# EAGLE board top_3-28-21 (EAGLE 9.6.1)
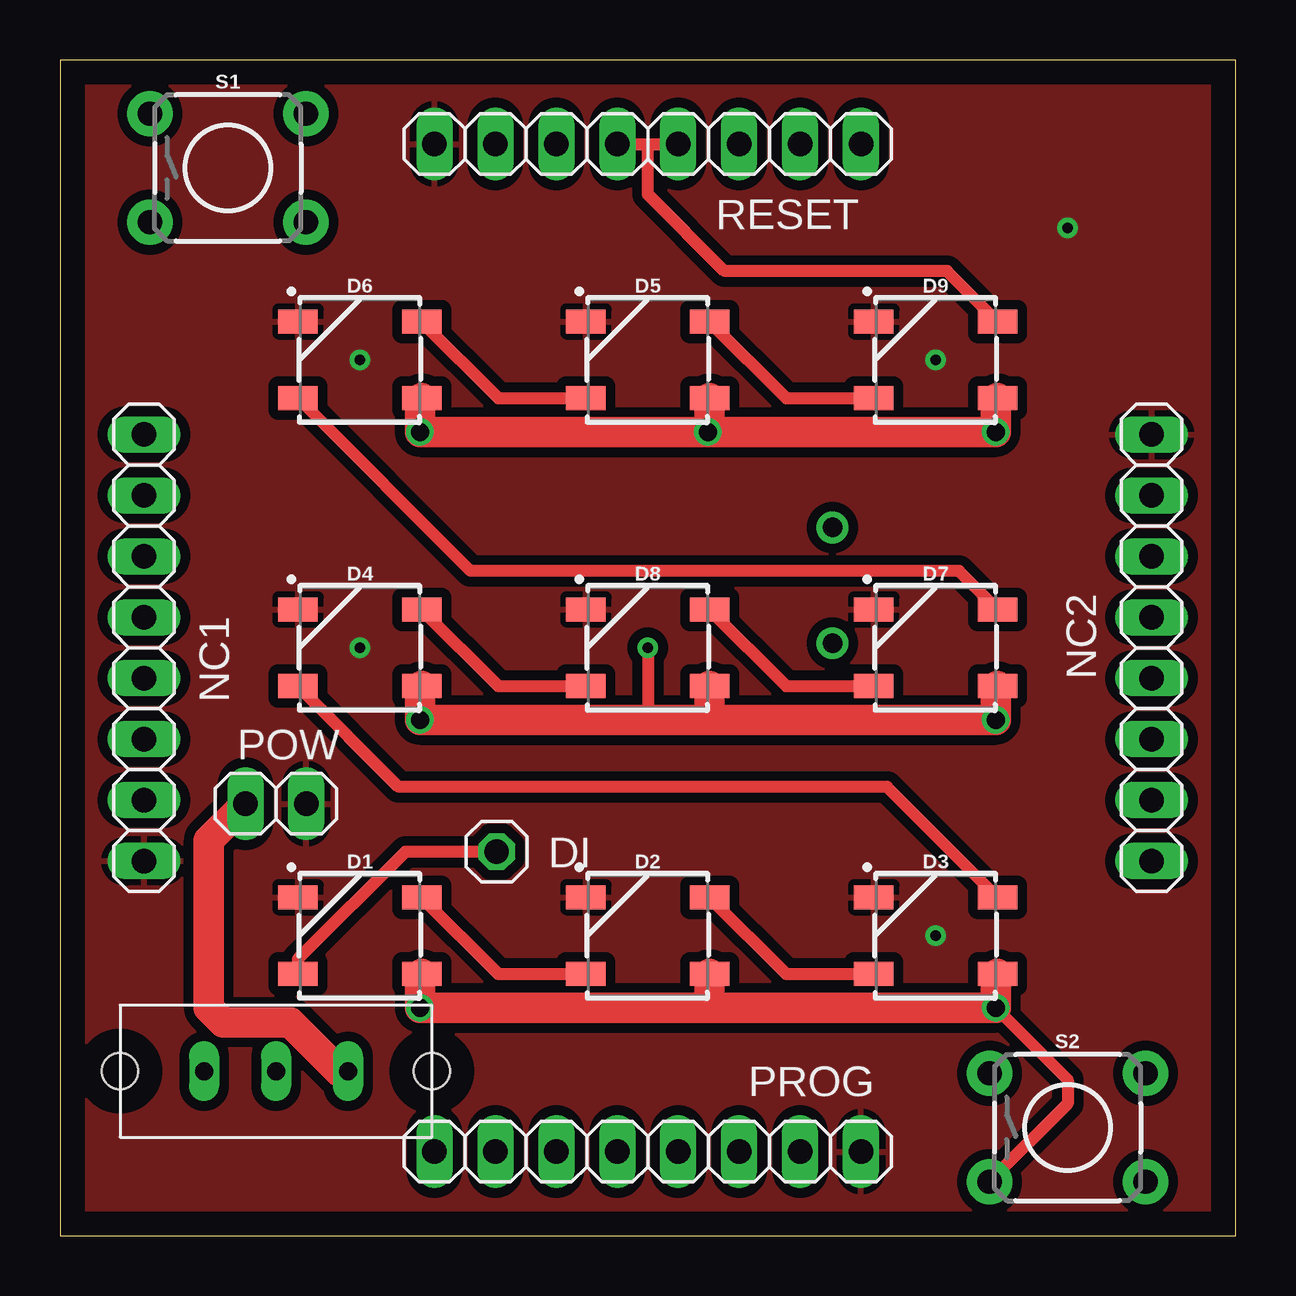
[diagram p0: board, top side]
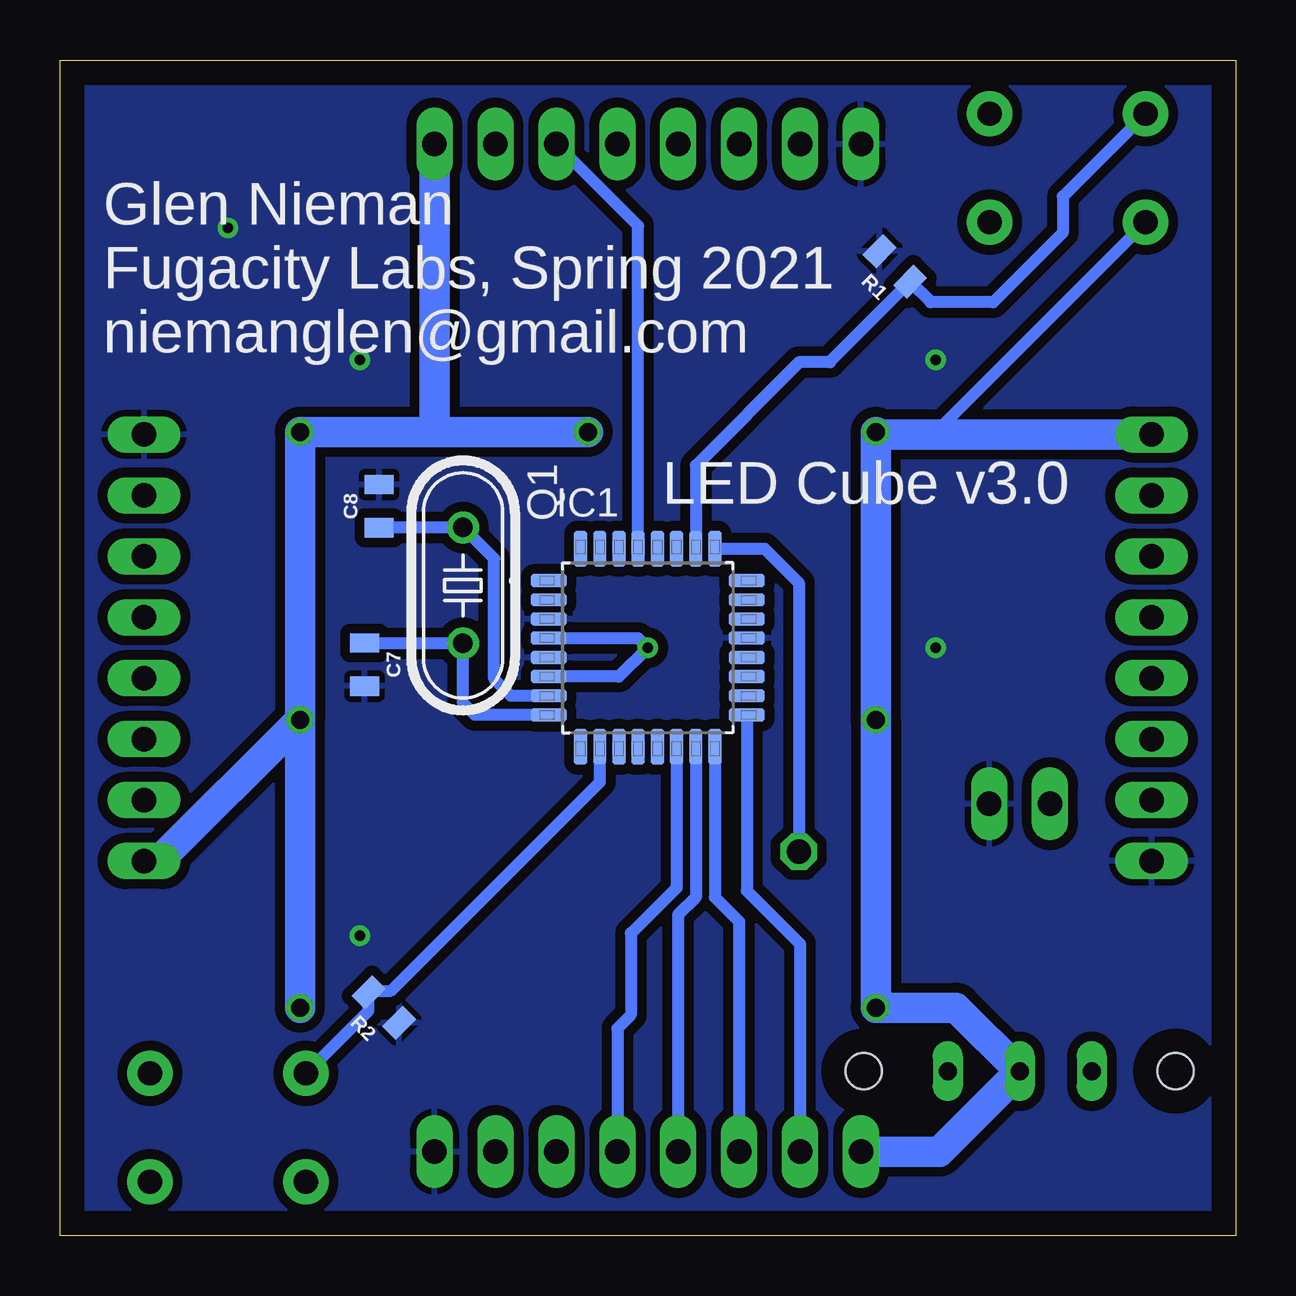
[diagram p1: board, bottom side, seen from below]

Size 49 x 49 mm. Coordinates in mm from the lower left corner, seen from the top.
Outline: 0,0 49,0 49,49 0,49 0,0
Copper layers (1*16): Top 0.035mm / dielectric 1.5mm / Bottom 0.035mm
Design rules "default *": minimum track width 6mil, minimum drill 0.35mm, track to track 6mil, track to pad 6mil, pad to pad 6mil, via to via 6mil, smd to smd 6mil, copper to edge 40mil, drill to drill 6mil, minimum pad ring 10mil, minimum via ring 8mil, stop-mask expansion 4mil, vias tented up to drill 100mil, thermal gap 10mil
Net classes: 1 pow_width: width 0.102 mm

## Footprints (pad centres in the part's own frame; a part is rotated, then mirrored left to right if it is on the bottom)
0805 = smd 0.8 x 1.2: 1 -0.9,0; 2 0.9,0
WS2812B = smd 1.651 x 1: 1 2.577,-1.6; 2 2.577,1.6; 3 -2.577,1.6; 4 -2.577,-1.6
1X01 = drill 1.016 octagon: 1 0,0
TQFP-32 = smd 1.5 x 0.57: 1 -4.13,2.8; 2 -4.13,2; 3 -4.13,1.2; 4 -4.13,0.4; 5 -4.13,-0.4; 6 -4.13,-1.2; 7 -4.13,-2; 8 -4.13,-2.8; 17 4.13,-2.8; 18 4.13,-2; 19 4.13,-1.2; 20 4.13,-0.4; 21 4.13,0.4; 22 4.13,1.2; 23 4.13,2; 24 4.13,2.8 | smd 0.57 x 1.5: 9 -2.8,-4.13; 10 -2,-4.13; 11 -1.2,-4.13; 12 -0.4,-4.13; 13 0.4,-4.13; 14 1.2,-4.13; 15 2,-4.13; 16 2.8,-4.13; 25 2.8,4.13; 26 2,4.13; 27 1.2,4.13; 28 0.4,4.13; 29 -0.4,4.13; 30 -1.2,4.13; 31 -2,4.13; 32 -2.8,4.13
1X08 = drill 1.016 long: 1 -8.89,0; 2 -6.35,0; 3 -3.81,0; 4 -1.27,0; 5 1.27,0; 6 3.81,0; 7 6.35,0; 8 8.89,0
1X02 = drill 1.016 long: 1 -1.27,0; 2 1.27,0
HC49/S = drill 0.813: 1 -2.413,0; 2 2.413,0
TACTILE_SWITCH_PTH_6.0MM = drill 1.016 pad 1.88: 1 -3.251,2.261; 2 3.251,2.261; 3 -3.251,-2.261; 4 3.251,-2.261
SLIDE_SWITCH_1P2T = drill 0.75 long: 1 3.5,2.75; 2 6.5,2.75; 3 9.5,2.75 | hole 1.5: 0,2.75; 13,2.75

## Placement (x,y rotation side)
C7  22pF  [0805]  36.3,23.8 270 bottom
C8  22pF  [0805]  35.7,30.4 90 bottom
D1  WS2812B  [WS2812B]  12.5,12.5 0 top
D2  WS2812B  [WS2812B]  24.5,12.5 0 top
D3  WS2812B  [WS2812B]  36.5,12.5 0 top
D4  WS2812B  [WS2812B]  12.5,24.5 0 top
D5  WS2812B  [WS2812B]  24.5,36.5 0 top
D6  WS2812B  [WS2812B]  12.5,36.5 0 top
D7  WS2812B  [WS2812B]  36.5,24.5 0 top
D8  WS2812B  [WS2812B]  24.5,24.5 0 top
D9  WS2812B  [WS2812B]  36.5,36.5 0 top
DI  [1X01]  18.2,16 0 top
IC1  ATMEGA328P-AU  [TQFP-32]  24.5,24.5 0 bottom
NC1  [1X08]  3.5,24.5 90 top
NC2  [1X08]  45.5,24.5 270 top
POW  [1X02]  9,18 0 top
PROG  [1X08]  24.5,3.5 180 top
Q1  [HC49/S]  32.2,27.1 270 bottom
R1  10k  [0805]  14.2,40.4 135 bottom
R2  10k  [0805]  35.5,9.5 135 bottom
RESET  [1X08]  24.5,45.5 0 top
S1  [TACTILE_SWITCH_PTH_6.0MM]  7,44.5 0 top
S2  [TACTILE_SWITCH_PTH_6.0MM]  42,4.5 0 top
U$2  SLIDE_SWITCH_1P2T  [SLIDE_SWITCH_1P2T]  15.5,9.6 180 top

## Library data of the parts
C7 C8 = SparkFun-Capacitors; PROD_ID: CAP-11625
D1-D9 = my-LED-cube; PROD_ID: DIO-12503
DI NC1 NC2 POW PROG RESET = pinhead
IC1 = Microcontroller; CREATED_BY: PCBLayout.com; DIGIKEY_PART_NUMBER: ATMEGA328P-AU-ND; MANUFACTURER: Microchip Technology; MPN: ATMEGA328P-AU; PACKAGE: TQFP-32
Q1 = adafruit; OC_FARNELL: 1667008; OC_NEWARK: unknown
R1 R2 = SparkFun-Resistors; PROD_ID: RES-11622
S1 S2 = SparkFun-Switches; PROD_ID: SWCH-08441; SF_SKU: COM-00097
U$2 = metronome

## Nets
AREF: IC1.20
AVCC: IC1.18
DI: D1.4 DI.1 IC1.25
DO: D9.2 RESET.4 RESET.5
GND: C7.2 C8.2 D1.3 D2.3 D3.3 D4.3 D5.3 D6.3 D7.3 D8.3 D9.3 IC1.3 IC1.5 IC1.21 NC1.1 NC2.1 POW.2 PROG.1 R1.2 R2.1 RESET.1
IN1: IC1.9
IN2: IC1.10 R2.2 S2.1
IN3: IC1.26 R1.1 S1.1
IN4: IC1.27
MISO: IC1.16 PROG.6
MOSI: IC1.15 PROG.5
N$1: D4.2 D8.4
N$2: D7.4 D8.2
N$3: D1.2 D2.4
N$4: D2.2 D3.4
N$5: D3.2 D4.4
N$6: D6.4 D7.2
N$7: D5.2 D9.4
N$15: C7.1 IC1.8 Q1.2
N$16: D5.4 D6.2
N$17: C8.1 IC1.7 Q1.1
RST: IC1.29 RESET.6
SCK: IC1.17 PROG.7
SS: IC1.14 PROG.4
USB-VDD [pow_width]: POW.1 U$2.1
VDD [pow_width]: D1.1 D2.1 D3.1 D4.1 D5.1 D6.1 D7.1 D8.1 D9.1 IC1.4 IC1.6 NC1.8 NC2.8 PROG.8 RESET.8 S1.3 S2.3 U$2.2

## Tracks (layer width: path | path; a pad name or v marks a point on that pad's centre or on a via)
DI
  Top 0.508: DI.1 14.4,16 9.92,11.52 D1.4
  Bottom 0.508: IC1.25 19.63,28.63 18.2,27.2 DI.1
DO
  Top 0.508: D9.2 36.98,40.2 27.7,40.2 24.5,43.4 24.5,45.5 | RESET.4 24.5,45.5 | 24.5,45.5 RESET.5
GND  (via drill 0.45)
  other vias: 12.5,36.5 36.5,36.5 36.5,12.5 12.5,24.5 42,42
  pour Top (isolate 0.406): 0,0 0,49 49,49 49,0
  pour Bottom (isolate 0.406): 0,0 0,49 49,49 49,0
IN2
  Bottom 0.508: S2.1 36.14,9.37 R2.2 36.07,10.2 35.2,10.2 26.5,18.9 IC1.10
IN3
  Bottom 0.508: S1.1 7.2,43.31 7.2,41.8 10.1,38.9 12.7,38.9 R1.1 16.9,36.43 16.9,36.4 18.2,36.4 22.5,32.1 IC1.26
MISO
  Bottom 0.508: IC1.16 21.7,14.1 20.69,13.09 PROG.6
MOSI
  Bottom 0.508: IC1.15 22.5,14.1 23.23,13.37 PROG.5
N$1
  Top 0.508: D4.2 18.28,22.9 D8.4
N$2
  Top 0.508: D8.2 30.28,22.9 D7.4
N$3
  Top 0.508: D1.2 18.28,10.9 D2.4
N$4
  Top 0.508: D2.2 30.28,10.9 D3.4
N$5
  Top 0.508: D3.2 34.48,18.7 14.12,18.7 D4.4
N$6
  Top 0.508: D7.2 37.48,27.7 17.12,27.7 D6.4
N$7
  Top 0.508: D5.2 30.28,34.9 D9.4
N$15
  Bottom 0.508: IC1.8 31.7,21.7 32.2,22.2 Q1.2 36.29,24.69 C7.1
N$16
  Top 0.508: D6.2 18.28,34.9 D5.4
N$17
  Bottom 0.508: IC1.7 30.2,22.5 30.9,23.2 30.9,28.21 Q1.1 35.69,29.51 C8.1
RST
  Bottom 0.508: IC1.29 24.9,42.09 RESET.6
SCK
  Bottom 0.508: IC1.17 20.37,14.37 18.15,12.15 PROG.7
SS
  Bottom 0.508: IC1.14 23.3,14.5 25.2,12.6 25.2,9.2 25.77,8.63 PROG.4
USB-VDD
  Top 1.27: U$2.1 11.63,6.85 9.59,8.89 6.8,8.89 6.2,9.5 6.2,16.47 POW.1
VDD  (via drill 0.45, 0.75)
  Top 0.508: v39,9.5 42,6.5 42,5.49 S2.3 | 24.4,21.5 24.5,21.6 v24.5,24.5
  Top 1.27: D6.1 15,34.82 v15,33.5 v27,33.5 | D4.1 15,22.82 v15,21.5 24.4,21.5 27,21.5 | D1.1 15,10.82 v15,9.5 26.8,9.5 | D3.1 39,10.82 v39,9.5 26.8,9.5 | D7.1 39,22.82 v39,21.5 27,21.5 | D9.1 39,34.82 v39,33.5 v27,33.5 | D5.1 27.08,33.58 v27,33.5 | D8.1 27.08,21.58 27,21.5 | D2.1 27.08,9.78 26.8,9.5
  Bottom 0.508: IC1.4 24.9,24.9 v24.5,24.5 25.7,23.3 IC1.6 | v15,33.5 12.49,33.5 S1.3
  Bottom 1.27: v39,21.5 v39,33.5 33.4,33.5 | v39,21.5 44.89,15.61 NC2.8 | PROG.8 12.35,3.5 U$2.2 11.65,9.5 v15,9.5 v15,21.5 v15,33.5 14.89,33.39 NC1.8 | v39,9.5 v39,21.5 | v27,33.5 33.4,33.5 | RESET.8 33.39,33.51 33.4,33.5

## Text on the board
bPlace: Glen Nieman / Fugacity Labs, Spring 2021 / niemanglen@gmail.com | LED Cube v3.0